# Altium PCB PCB1_1.pcbdoc (part 2 of 2)
Units mil, origin at the board's own origin, x right, y up, seen from the top; angles counter-clockwise.
Board outline 2868.46 x 4078.48 mil, 4 copper layers (Top Layer, Inner1, Inner2, Bottom Layer); 93 components, 179 nets, 649 pads, 461 vias.
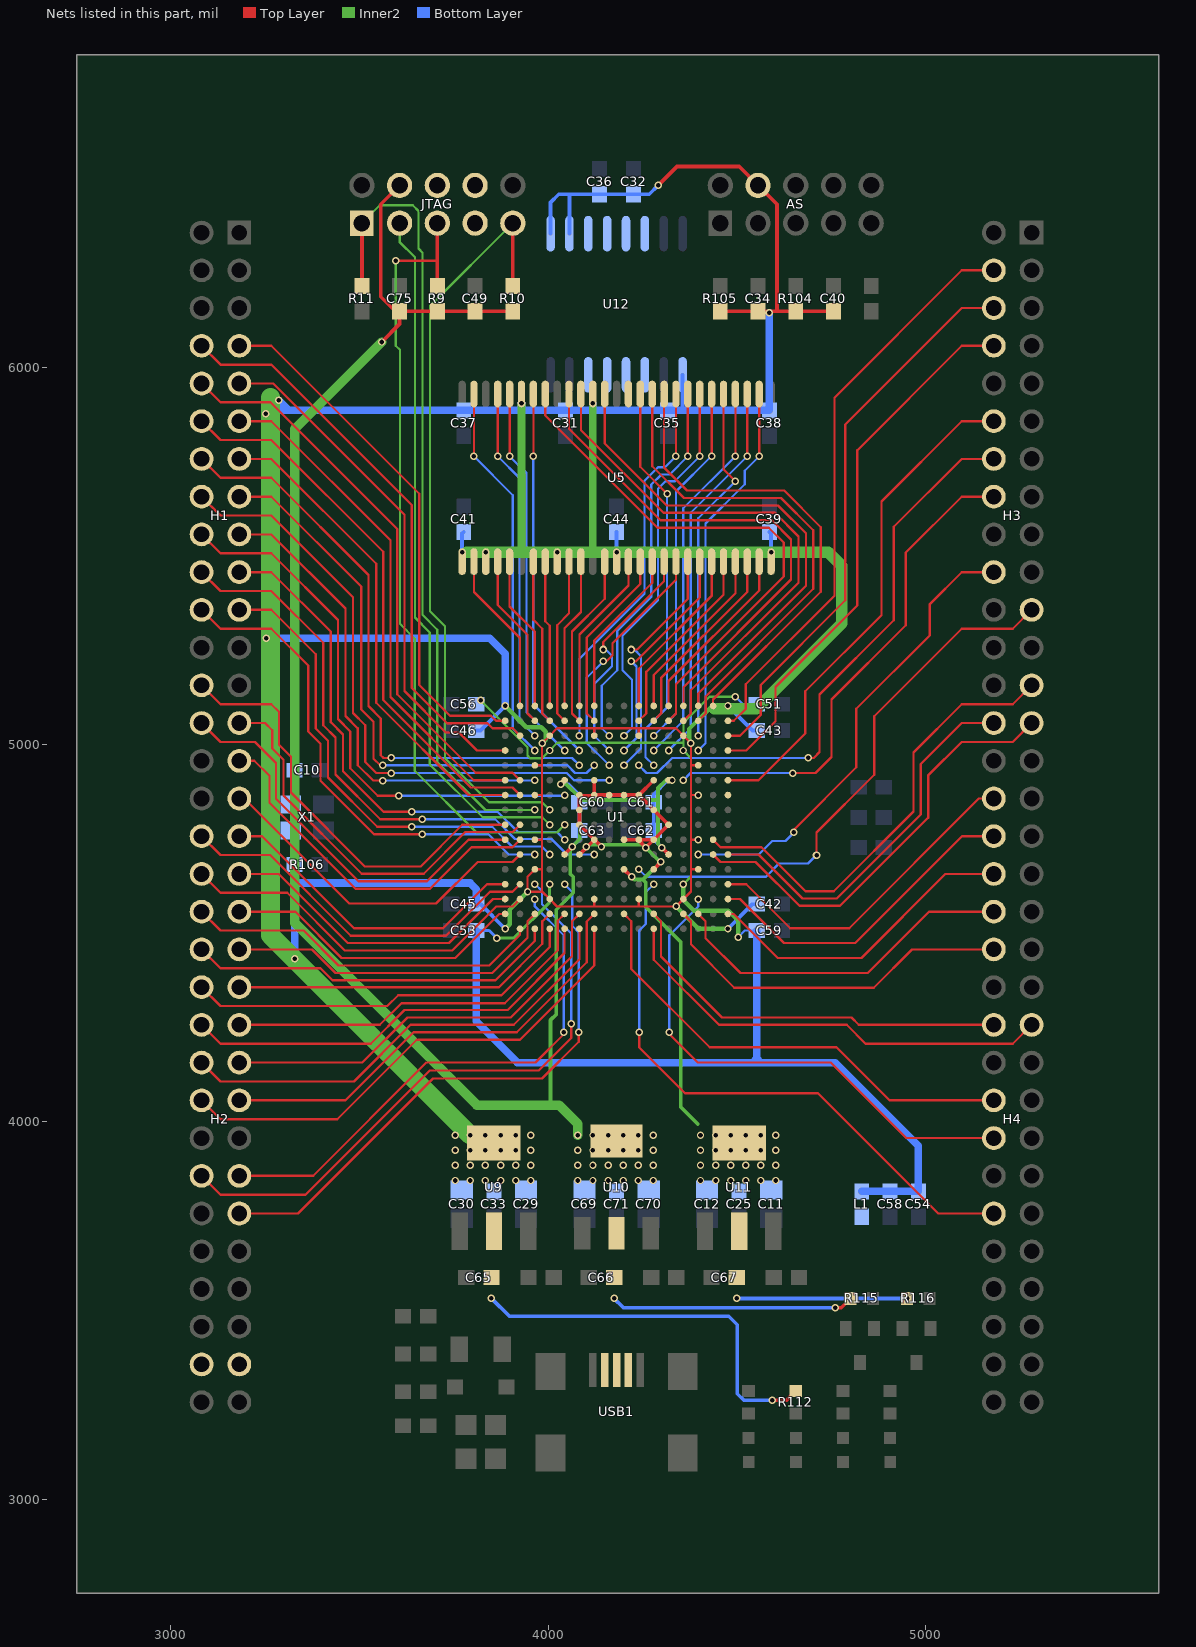
[diagram p4: the nets of this part, all layers, seen from the top]

## Via types
v1: diameter 19.7, hole 12, Top Layer to Bottom Layer, 304 vias
v2: diameter 20, hole 12, Top Layer to Bottom Layer, 157 vias

## Nets (pads, with @x,y where several pads share a name; then routed paths per layer and width w, separated by ;. In a path a pad name is that pad's centre, name@x,y a point inside that pad or via, vN(x,y) a via of type N, cw(c..) or ccw(c..) an arc to the next point about the centre after c; other vN are vias at no path point) (continued)
SD_SCLK_O: H1.19 U1.K5 | length 1353.8
  Top Layer w6: H1.19@3181.1,5456.83 3266.1,5456.83 3423.37,5299.57 3423.37,5059.27 3456.1,5026.54 3456.1,4929 3563.28,4821.83 v2(3638.6,4821.83)
  Bottom Layer w6: v2(3638.6,4821.83) 3865.69,4821.83 3919.79,4767.73 4023.3,4767.73 v2(4043.3,4747.73)
SD_SW_I: H4.16 U1.R9 | length 1259.1
  Top Layer w6: U1.R9@4200.8,4550.93 4220.1,4531.63 4220.1,4405.12 4427.8,4197.43 4763.93,4197.43 4904.53,4056.83 H4.16@5181.1,4056.83
SDRAM_AD_O_0: U1.B10 U5.23 | length 514.9
  Top Layer w6: U1.B10@4240.2,5062.73 4259.84,5082.37 4259.84,5192.44 4464.57,5397.17 U5.23@4464.57,5484.7
SDRAM_AD_O_1: U1.A11 U5.24 | length 472.3
  Top Layer w6: U1.A11@4279.5,5102.13 4279.5,5184.3 4496.06,5400.86 U5.24@4496.06,5484.7
SDRAM_AD_O_2: U1.B11 U5.25 | length 524.7
  Top Layer w6: U1.B11@4279.5,5062.73 4299.21,5082.44 4299.21,5176.13 4527.56,5404.48 U5.25@4527.56,5484.7
SDRAM_AD_O_3: U1.A12 U5.26 | length 482
  Top Layer w6: U1.A12@4318.9,5102.13 4318.9,5167.98 4559.05,5408.13 U5.26@4559.05,5484.7
SDRAM_AD_O_4: U1.D14 U5.29 | length 1011.7
  Top Layer w6: v2@4559.15,5763.88 U5.29@4559.15,5928.88
  Bottom Layer w6: v2(4397.6,4984.03) 4417.1,5003.53 4417.1,5585.83 4521.1,5689.83 4521.1,5725.83 v2(4559.1,5763.83)
SDRAM_AD_O_5: U1.D12 U5.30 | length 1031.4
  Top Layer w6: v2(4527.56,5763.96) U5.30@4527.56,5928.96
  Bottom Layer w6: v2(4318.9,4984.03) 4377.9,5043.03 4377.9,5614.3 v2(4527.56,5763.96)
SDRAM_AD_O_6: U1.D11 U5.31 | length 1034.6
  Top Layer w6: v2(4496.06,5763.96) U5.31@4496.06,5928.96
  Bottom Layer w6: v2(4279.5,4984.03) 4358.1,5062.63 4358.1,5626 v2(4496.06,5763.96)
SDRAM_AD_O_7: U1.C14 U5.32 | length 959.5
  Top Layer w6: U5.32@4464.57,5928.96 4464.57,5729.36 v2(4496.1,5697.83)
  Bottom Layer w6: v2(4397.6,5023.33) 4397.6,5599.33 v2(4496.1,5697.83)
SDRAM_AD_O_8: U1.C11 U5.33 | length 969.7
  Top Layer w6: v2(4433.07,5763.96) U5.33@4433.07,5928.96
  Bottom Layer w6: v2(4279.5,5023.33) 4338.5,5082.33 4338.5,5670.23 4432.23,5763.96 v2(4433.07,5763.96)
SDRAM_AD_O_9: U1.C9 U5.34 | length 1023.8
  Top Layer w6: v2(4401.57,5763.96) U5.34@4401.57,5928.96
  Bottom Layer w6: v2(4200.8,5023.33) 4222.1,5044.63 4222.1,5171.83 4197.1,5196.83 4197.1,5288.83 4291.1,5382.83 4291.1,5677.83 4311.1,5697.83 4335.44,5697.83 v2(4401.57,5763.96)
SDRAM_AD_O_10: U1.A10 U5.22 | length 462.5
  Top Layer w6: U1.A10@4240.2,5102.13 4240.2,5200.58 4433.07,5393.45 U5.22@4433.07,5484.7
SDRAM_AD_O_11: U1.C8 U5.35 | length 1021.2
  Top Layer w6: v2(4370.08,5763.96) U5.35@4370.08,5928.96
  Bottom Layer w6: v2(4161.4,5023.33) 4141.73,5043 4141.73,5155.44 4183.1,5196.81 4183.1,5300.83 4273.1,5390.83 4273.1,5688.83 4300.1,5715.83 4321.95,5715.83 v2(4370.08,5763.96)
SDRAM_AD_O_12: U1.C6 U5.36 | length 1022.4
  Top Layer w6: v2(4338.58,5763.96) U5.36@4338.58,5928.96
  Bottom Layer w6: v2(4082.7,5023.33) 4082.7,5227.43 4255.1,5399.83 4255.1,5698.83 4291.1,5734.83 4309.45,5734.83 v2(4338.58,5763.96)
SDRAM_BA_O_0: U1.E9 U5.20 | length 645.3
  Top Layer w6: v2(4220.47,5251.71) 4236.22,5251.71 4370.08,5385.57 U5.20@4370.08,5484.7
  Bottom Layer w6: v2(4200.8,4944.63) 4246.1,4989.93 4246.1,5233.96 4228.35,5251.71 v2(4220.47,5251.71)
SDRAM_BA_O_1: U1.D9 U5.21 | length 602
  Top Layer w6: v2(4220.47,5220.22) 4232.28,5220.22 4401.57,5389.5 U5.21@4401.57,5484.7
  Bottom Layer w6: v2(4200.8,4984.03) 4234.1,5017.33 4234.1,5206.59 v2(4220.47,5220.22)
SDRAM_CAS_O: U1.A7 U5.17 | length 446.2
  Top Layer w6: U1.A7@4122,5102.13 4122,5275.29 4275.59,5428.88 U5.17@4275.59,5484.7
SDRAM_CKE_O: U1.A15 U5.37 | length 1267.9
  Top Layer w6: U5.37@4307.08,5928.96 4307.08,5733.85 4367.97,5672.97 4625.41,5672.97 4722.44,5575.94 4722.44,5404.49 4437,5119.06 U1.A15@4437,5102.13
SDRAM_CLK_O: U1.B14 U5.38 | length 1320.4
  Top Layer w6: U5.38@4275.59,5928.96 4275.59,5737.51 4359.81,5653.29 4617.26,5653.29 4702.76,5567.79 4702.76,5412.64 4417.32,5127.21 4417.32,5082.45 U1.B14@4397.6,5062.73
SDRAM_CS_O: U1.E8 U5.19 | length 667.2
  Top Layer w6: v2(4145.67,5220.22) 4153.54,5220.22 4170.06,5236.73 4170.06,5268.23 4338.58,5436.75 U5.19@4338.58,5484.7
  Bottom Layer w6: v2(4145.67,5220.22) 4102.1,5176.65 4102.1,5003.93 v2(4161.4,4944.63)
SDRAM_DA_IO_0: U1.A2 U5.2 | length 433.1
  Top Layer w6: U5.2@3803.15,5484.7 3803.15,5404.42 3925.2,5282.37 U1.A2@3925.2,5102.13
SDRAM_DA_IO_1: U1.B3 U5.4 | length 462.8
  Top Layer w6: U5.4@3866.14,5484.7 3866.14,5369.57 3945.1,5290.61 3945.1,5082.23 U1.B3@3964.6,5062.73
SDRAM_DA_IO_2: U1.A3 U5.5 | length 410.3
  Top Layer w6: U5.5@3897.64,5484.7 3897.64,5365.65 3964.6,5298.69 U1.A3@3964.6,5102.13
SDRAM_DA_IO_3: U1.B4 U5.7 | length 439.9
  Top Layer w6: U5.7@3960.63,5484.7 3960.63,5330.45 3984.25,5306.83 3984.25,5082.38 U1.B4@4003.9,5062.73
SDRAM_DA_IO_4: U1.A4 U5.8 | length 387.4
  Top Layer w6: U5.8@3992.12,5484.7 3992.12,5326.75 4003.9,5314.97 U1.A4@4003.9,5102.13
SDRAM_DA_IO_5: U1.B5 U5.10 | length 443.2
  Top Layer w6: U1.B5@4043.3,5062.73 4023.62,5082.41 4023.62,5316.04 4055.12,5347.54 U5.10@4055.12,5484.7
SDRAM_DA_IO_6: U1.A5 U5.11 | length 400.5
  Top Layer w6: U1.A5@4043.3,5102.13 4043.3,5307.89 4086.61,5351.2 U5.11@4086.61,5484.7
SDRAM_DA_IO_7: U1.B6 U5.13 | length 466
  Top Layer w6: U1.B6@4082.7,5062.73 4062.99,5082.44 4062.99,5299.73 4149.6,5386.34 U5.13@4149.6,5484.7
SDRAM_DA_IO_8: U1.A14 U5.42 | length 1339
  Top Layer w6: U5.42@4149.6,5928.96 4149.6,5797.78 4313.82,5633.57 4609.09,5633.57 4683.04,5559.62 4683.04,5420.81 4397.6,5135.38 U1.A14@4397.6,5102.13
SDRAM_DA_IO_9: U1.B13 U5.44 | length 1404.5
  Top Layer w6: U5.44@4086.61,5928.96 4086.61,5832.98 4305.68,5613.92 4600.95,5613.92 4663.39,5551.48 4663.39,5428.95 4377.95,5143.52 4377.95,5082.38 U1.B13@4358.3,5062.73
SDRAM_DA_IO_10: U1.A13 U5.45 | length 1361.8
  Top Layer w6: U5.45@4055.12,5928.96 4055.12,5836.68 4297.54,5594.27 4592.81,5594.27 4643.74,5543.34 4643.74,5437.09 4358.3,5151.66 U1.A13@4358.3,5102.13
SDRAM_DA_IO_11: U1.B12 U5.47 | length 1427.3
  Top Layer w6: U5.47@3992.12,5928.96 3992.12,5871.79 4289.37,5574.55 4584.65,5574.55 4624.02,5535.18 4624.02,5445.26 4338.58,5159.83 4338.58,5082.41 U1.B12@4318.9,5062.73
SDRAM_DA_IO_12: U1.D6 U5.48 | length 995.5
  Top Layer w6: v2@3960.68,5764.01 U5.48@3960.68,5929.01
  Bottom Layer w6: v2(3960.63,5763.96) 3960.63,5106.1 v2(4082.7,4984.03)
SDRAM_DA_IO_13: U1.D5 U5.50 | length 1005.3
  Top Layer w6: v2@3897.69,5764.01 U5.50@3897.69,5929.01
  Bottom Layer w6: v2(3897.64,5763.96) 3942.1,5719.5 3942.1,5085.23 v2(4043.3,4984.03)
SDRAM_DA_IO_14: U1.C3 U5.51 | length 946.4
  Top Layer w6: v2@3866.19,5764.01 U5.51@3866.19,5929.01
  Bottom Layer w6: v2(3866.14,5763.96) 3924.1,5706 3924.1,5063.83 v2(3964.6,5023.33)
SDRAM_DA_IO_15: U1.D3 U5.53 | length 1011.8
  Top Layer w6: v2(3803.15,5763.96) U5.53@3803.15,5928.96
  Bottom Layer w6: v2@3803.1,5763.91 3906.1,5660.91 3906.1,5042.53 v2(3964.6,4984.03)
SDRAM_DQM_O_0: U1.A6 U5.15 | length 436.4
  Top Layer w6: U1.A6@4082.7,5102.13 4082.7,5291.57 4212.6,5421.47 U5.15@4212.6,5484.7
SDRAM_DQM_O_1: U1.E11 U5.39 | length 1046.2
  Top Layer w6: U5.39@4244.09,5928.96 4244.09,5735.84 v2(4315.1,5664.83)
  Bottom Layer w6: v2(4279.5,4944.63) 4258.1,4966.03 4258.1,5040.83 4315.1,5097.83 v2(4315.1,5664.83)
SDRAM_RAS_O: U1.D8 U5.18 | length 617.1
  Top Layer w6: v2(4145.67,5251.71) 4145.67,5271.4 4307.08,5432.81 U5.18@4307.08,5484.7
  Bottom Layer w6: v2(4145.67,5251.71) 4152.74,5251.71 4169.1,5235.35 4169.1,5207.37 4122.1,5160.37 4122.1,5023.33 v2(4161.4,4984.03)
SDRAM_WE_O: U1.B7 U5.16 | length 488.8
  Top Layer w6: U1.B7@4122,5062.73 4102.36,5082.37 4102.36,5283.42 4244.09,5425.15 U5.16@4244.09,5484.7
SLOT_A_O_0: H2.12 U1.T5 | length 1146.9
  Top Layer w6: H2.12@3081.1,4256.83 3131.1,4206.83 3529.34,4206.83 3618.74,4296.23 3892.52,4296.23 4043.3,4447.01 U1.T5@4043.3,4511.53
SLOT_A_O_1: H2.13 U1.R6 | length 1119
  Top Layer w6: H2.13@3181.1,4156.83 3507.34,4156.83 3626.94,4276.43 3900.72,4276.43 4063.1,4438.81 4063.1,4531.33 U1.R6@4082.7,4550.93
SLOT_A_O_2: H2.14 U1.T6 | length 1237.3
  Top Layer w6: H2.14@3081.1,4156.83 3131.1,4106.83 3485.06,4106.83 3635.06,4256.83 3908.84,4256.83 4082.7,4430.69 U1.T6@4082.7,4511.53
SLOT_A_O_3: H2.15 U1.R7 | length 1209
  Top Layer w6: H2.15@3181.1,4056.83 3462.5,4056.83 3643.1,4237.43 3916.88,4237.43 4102.1,4422.66 4102.1,4531.03 U1.R7@4122,4550.93
SLOT_A_O_4: H2.16 U1.T7 | length 1327.6
  Top Layer w6: H2.16@3081.1,4056.83 3131.1,4006.83 3441.1,4006.83 3651.8,4217.53 3925.12,4217.53 4122,4414.41 U1.T7@4122,4511.53
SLOT_A_O_5: H4.22 U1.N11 | length 1571
  Top Layer w6: v2(4241.1,4236.83) 4241.1,4196.83 4362.42,4075.51 4714.92,4075.51 5033.6,3756.83 H4.22@5181.1,3756.83
  Bottom Layer w6: v2(4241.1,4236.83) 4241.1,4506.83 4258.6,4524.33 4258.6,4608.73 v2(4279.5,4629.63)
SLOT_A_O_6: H2.21 U1.N5 | length 1521.9
  Top Layer w6: H2.21@3181.1,3756.83 3336.95,3756.83 3694.52,4114.4 3983.68,4114.4 4081.1,4211.83 v2(4081.1,4236.83)
  Bottom Layer w6: v2(4043.3,4629.63) 4063.6,4609.33 4063.6,4519.33 4081.1,4501.83 v2(4081.1,4236.83)
SLOT_A_O_7: H2.7 U1.R3 | length 899.8
  Top Layer w6: H2.7@3181.1,4456.83 3373.76,4456.83 3436.16,4394.43 3851.85,4394.43 3945.1,4487.69 3945.1,4531.43 U1.R3@3964.6,4550.93
SLOT_A_O_8: H2.8 U1.T3 | length 992.7
  Top Layer w6: H2.8@3081.1,4456.83 3131.1,4406.83 3396.18,4406.83 3428.08,4374.93 3859.92,4374.93 3964.6,4479.61 U1.T3@3964.6,4511.53
SLOT_A_O_9: H1.27 U1.J2 | length 1047
  Top Layer w6: H1.27@3181.1,5056.83 3249.39,5056.83 3268.6,5037.62 3268.6,4989.33 3298.6,4959.33 3298.6,4864.54 3505.61,4657.53 3670.06,4657.53 3780.36,4767.83 3905.9,4767.83 U1.J2@3925.2,4787.13
SLOT_A_O_10: H1.29 U1.K2 | length 980.4
  Top Layer w6: H1.29@3181.1,4956.83 3221.1,4956.83 3261.1,4916.83 3261.1,4845.47 3489.04,4617.53 3686.63,4617.53 3796.93,4727.83 3905.3,4727.83 U1.K2@3925.2,4747.73
SLOT_A_O_11: H1.20 U1.L7 | length 1536.1
  Top Layer w6: H1.20@3081.1,5456.83 3131.1,5406.83 3266.1,5406.83 3403.6,5269.33 3403.6,5050.75 3436.1,5018.25 3436.1,4920.72 3554.99,4801.83 v2(3666.1,4801.83)
  Bottom Layer w6: v2(3666.1,4801.83) 3859.66,4801.83 3912.16,4749.33 4008.6,4749.33 4049.5,4708.43 v2(4122,4708.43)
SLOT_A_O_12: H2.9 U1.R4 | length 938.1
  Top Layer w6: H2.9@3181.1,4356.83 3869.4,4356.83 3984.1,4471.53 3984.1,4531.13 U1.R4@4003.9,4550.93
SLOT_A_O_13: H2.10 U1.T4 | length 1056.5
  Top Layer w6: H2.10@3081.1,4356.83 3131.1,4306.83 3573.6,4306.83 3602.4,4335.63 3876.2,4335.63 4003.9,4463.33 U1.T4@4003.9,4511.53
SLOT_A_O_14: H2.11 U1.R5 | length 1029.8
  Top Layer w6: H2.11@3181.1,4256.83 3553.6,4256.83 3611.2,4314.43 3884.98,4314.43 4025.1,4454.55 4025.1,4532.73 U1.R5@4043.3,4550.93
SLOT_A_O_15: H1.18 U1.G5 | length 1460.8
  Top Layer w6: H1.18@3081.1,5556.83 3131.1,5506.83 3266.1,5506.83 3442.81,5330.12 3442.81,5067.33 3475.55,5034.59 3475.55,4937.06 3548.28,4864.33 v2(3603.6,4864.33)
  Bottom Layer w6: v2(3603.6,4864.33) 4041.7,4864.33 v2(4043.3,4865.93)
SLOT_BUSDIR_I: H1.14 U1.E6 | length 1598.7
  Top Layer w6: H1.14@3081.1,5756.83 3131.1,5706.83 3266.1,5706.83 3523.6,5449.33 3523.6,5101.86 3556.34,5069.13 3556.34,4971.59 3563.6,4964.33 v2(3583.6,4964.33)
  Bottom Layer w6: v2(3583.6,4964.33) 4063,4964.33 v2(4082.7,4944.63)
SLOT_CLOCK_O: H4.12 U1.R11 | length 1078.2
  Top Layer w6: U1.R11@4279.5,4550.93 4299.1,4531.33 4299.1,4437.85 4460.52,4276.43 4803.6,4276.43 4823.2,4256.83 H4.12@5181.1,4256.83
SLOT_CS1_O: H1.9 U1.D1 | length 1381.5
  Top Layer w6: H1.9@3181.1,5956.83 3271.1,5956.83 3618.98,5608.96 3618.98,5141.46 3728.6,5031.83 3763.6,5031.83 3811.4,4984.03 U1.D1@3885.8,4984.03
SLOT_CS2_O: H1.8 U1.C2 | length 1556.3
  Top Layer w6: H1.8@3081.1,6056.83 3131.1,6006.83 3266.1,6006.83 3638.42,5634.51 3638.42,5149.51 3731.66,5056.28 3839.16,5056.28 3852.6,5042.83 3905.7,5042.83 U1.C2@3925.2,5023.33
SLOT_D_IO_0: H2.2 U1.N2 | length 1009.8
  Top Layer w6: H2.2@3081.1,4756.83 3131.1,4706.83 3263.1,4706.83 3476.7,4493.23 3729.21,4493.23 3845.81,4609.83 3905.4,4609.83 U1.N2@3925.2,4629.63
SLOT_D_IO_1: H2.1 U1.N1 | length 849
  Top Layer w6: H2.1@3186.1,4756.83 3241.1,4756.83 3484.9,4513.03 3721,4513.03 3837.6,4629.63 U1.N1@3885.8,4629.63
SLOT_D_IO_2: H2.4 U1.P2 | length 984.4
  Top Layer w6: H2.4@3081.1,4656.83 3131.1,4606.83 3307.95,4606.83 3460.55,4454.23 3745.36,4454.23 3861.96,4570.83 3905.7,4570.83 U1.P2@3925.2,4590.33
SLOT_D_IO_3: H2.3 U1.P1 | length 828.8
  Top Layer w6: H2.3@3181.1,4656.83 3285.52,4656.83 3468.62,4473.73 3737.28,4473.73 3853.88,4590.33 U1.P1@3885.8,4590.33
SLOT_D_IO_4: H2.6 U1.T2 | length 952.5
  Top Layer w6: H2.6@3081.1,4556.83 3131.1,4506.83 3351.9,4506.83 3444.4,4414.33 3843.6,4414.33 3925.2,4495.93 U1.T2@3925.2,4511.53
SLOT_D_IO_5: H2.5 U1.R1 | length 803.7
  Top Layer w6: H2.5@3181.1,4556.83 3329.8,4556.83 3452.3,4434.33 3753.6,4434.33 3870.2,4550.93 U1.R1@3885.8,4550.93
SLOT_D_IO_6: H2.19 U1.P3 | length 1405.5
  Top Layer w6: H2.19@3181.1,3856.83 3376.95,3856.83 3676.95,4156.83 3966.1,4156.83 4041.1,4231.83 v2(4041.1,4236.83)
  Bottom Layer w6: v2(3964.6,4590.33) 3964.6,4570.83 4041.1,4494.33 v2(4041.1,4236.83)
SLOT_D_IO_7: H2.20 U1.N3 | length 1621.1
  Top Layer w6: H2.20@3081.1,3856.83 3131.1,3806.83 3356.95,3806.83 3685.73,4135.62 3974.89,4135.62 4061.1,4221.83 v2(4061.1,4259.33)
  Bottom Layer w6: v2(3964.6,4629.63) 3965.8,4629.63 3983.6,4611.83 3983.6,4576.83 4061.1,4499.33 v2(4061.1,4259.33)
SLOT_DATA_DIR_O: H3.21 U1.M10 | length 1468.1
  Top Layer w6: v2(4711.1,4706.83) 4711.1,4766.83 4864.24,4919.97 4864.24,5074.97 5096.1,5306.83 5231.1,5306.83 H3.21@5281.1,5356.83
  Bottom Layer w6: v2(4240.2,4669.03) 4259.9,4649.33 4576.94,4649.33 4611.94,4684.33 4688.6,4684.33 v2(4711.1,4706.83)
SLOT_DATA_OE_O: H1.31 U1.L2 | length 902.2
  Top Layer w6: H1.31@3192.13,4856.83 3194.59,4856.83 3472.89,4578.53 3702.78,4578.53 3813.08,4688.83 3905.6,4688.83 U1.L2@3925.2,4708.43
SLOT_INT_I: H1.11 U1.F1 | length 1342
  Top Layer w6: H1.11@3181.1,5856.83 3266.1,5856.83 3581.85,5541.08 3581.85,5126.08 3802.7,4905.23 U1.F1@3885.8,4905.23
SLOT_IOREQ_O: H1.21 U1.L4 | length 1263.8
  Top Layer w6: H1.21@3181.1,5356.83 3266.1,5356.83 3383.6,5239.33 3383.6,5042.47 3416.1,5009.97 3416.1,4912.44 3546.71,4781.83 v2(3638.6,4781.83)
  Bottom Layer w6: v2(3638.6,4781.83) 3851.38,4781.83 3903.88,4729.33 3983,4729.33 v2(4003.9,4708.43)
SLOT_M1_O: H1.15 U1.E7 | length 1500.9
  Top Layer w6: H1.15@3181.1,5656.83 3266.1,5656.83 3504.07,5418.87 3504.07,5092.7 3536.8,5059.96 3536.8,4962.43 3554.6,4944.63 v2(3561.1,4944.63)
  Bottom Layer w6: v2(3561.1,4944.63) 4050.8,4944.63 4071.1,4924.33 4101.7,4924.33 v2(4122,4944.63)
SLOT_MERQ_O: H1.16 U1.F8 | length 1628.5
  Top Layer w6: H1.16@3081.1,5656.83 3131.1,5606.83 3266.1,5606.83 3482.36,5390.57 3482.36,5083.71 3515.1,5050.97 3515.1,4953.44 3544.21,4924.33 v2(3583.6,4924.33)
  Bottom Layer w6: v2(3583.6,4924.33) 4049.28,4924.33 4068.38,4905.23 v2(4161.4,4905.23)
SLOT_RD_O: H1.22 U1.L3 | length 1311.8
  Top Layer w6: H1.22@3081.1,5356.83 3131.1,5306.83 3266.1,5306.83 3363.6,5209.33 3363.6,5034.18 3396.1,5001.68 3396.1,4904.15 3538.42,4761.83 v2(3666.1,4761.83)
  Bottom Layer w6: v2(3666.1,4761.83) 3841.82,4761.83 3895.22,4708.43 v2(3964.6,4708.43)
SLOT_RESET_IO: H1.28 U1.K1 | length 1079.6
  Top Layer w6: H1.28@3081.1,5056.83 3131.1,5006.83 3222.68,5006.83 3278.5,4951 3278.5,4856.21 3497.28,4637.43 3678.39,4637.43 3788.69,4747.73 U1.K1@3885.8,4747.73
SLOT_RFSH_I: H1.12 U1.G2 | length 1484.5
  Top Layer w6: H1.12@3081.1,5856.83 3131.1,5806.83 3266.1,5806.83 3562.41,5510.53 3562.41,5118.03 3794.6,4885.83 3905.3,4885.83 U1.G2@3925.2,4865.93
SLOT_SLOT1_O: H1.10 U1.F2 | length 1536
  Top Layer w6: H1.10@3081.1,5956.83 3131.1,5906.83 3263.6,5906.83 3599.53,5570.9 3599.53,5133.4 3808.1,4924.83 3905.6,4924.83 U1.F2@3925.2,4905.23
SLOT_SLOT2_O: H1.17 U1.F3 | length 1278.3
  Top Layer w6: H1.17@3181.1,5556.83 3266.1,5556.83 3462.36,5360.57 3462.36,5075.42 3495.1,5042.69 3495.1,4945.16 3535.92,4904.33 v2(3561.1,4904.33)
  Bottom Layer w6: v2(3561.1,4904.33) 3963.7,4904.33 v2(3964.6,4905.23)
SLOT_SLOT3_O: H1.7 U1.B1 | length 1413.4
  Top Layer w6: H1.7@3181.1,6056.83 3266.1,6056.83 3658.32,5664.61 3658.32,5157.75 3739.9,5076.18 3847.87,5076.18 3861.31,5062.73 U1.B1@3885.8,5062.73
SLOT_WAIT_I: H1.13 U1.G1 | length 1289.5
  Top Layer w6: H1.13@3181.1,5756.83 3266.1,5756.83 3544.15,5478.78 3544.15,5110.46 3788.69,4865.93 U1.G1@3885.8,4865.93
SLOT_WR_O: H1.26 U1.J1 | length 1156.1
  Top Layer w6: H1.26@3081.1,5156.83 3131.1,5106.83 3266.1,5106.83 3286.1,5086.83 3286.1,4999.12 3317.9,4967.32 3317.9,4872.53 3513.6,4676.83 3662.07,4676.83 3772.37,4787.13 U1.J1@3885.8,4787.13
TCK: JTAG.1 R11.1 U1.H3 | length 2134.6
  Top Layer w10: R11.1@3506.1,6215.29 JTAG.1@3506.1,6381.83
  Inner2 w6: JTAG.1@3506.1,6381.83 3553.6,6429.33 3641.1,6429.33 3656.1,6414.33 3656.1,6314.33 3666.8,6303.63 3666.8,5343.63 3706.1,5304.33 3706.1,4954.33 3833.9,4826.53 v2(3964.6,4826.53)
TDI: JTAG.9 R10.1 U1.H4 | length 2026.5
  Top Layer w10: R10.1@3906.1,6215.29 JTAG.9@3906.1,6381.83
  Inner2 w6: JTAG.9@3906.1,6381.83 3686.8,6162.53 3686.8,5352.85 3726.1,5313.55 3726.1,4963.55 3842.82,4846.83 3983.6,4846.83 v2(4003.9,4826.53)
TDO: JTAG.3 U1.J4 | length 1852
  Inner2 w6: JTAG.3@3606.1,6381.83 3606.1,6331.83 3646.8,6291.13 3646.8,5336.28 3686.1,5296.98 3686.1,4946.98 3826.25,4806.83 3984.2,4806.83 v2(4003.9,4787.13)
TMS: JTAG.5 R9.1 U1.J5 | length 2122
  Top Layer w6: v2(3596.1,6281.83) 3706.1,6281.83
  Top Layer w10: R9.1@3706.1,6215.29 3706.1,6281.83 JTAG.5@3706.1,6381.83
  Inner2 w6: v2(3596.1,6281.83) 3596.1,6056.83 3606.8,6046.13 3606.8,5319.71 3646.1,5280.41 3646.1,4930.41 3809.68,4766.83 4023,4766.83 v2(4043.3,4787.13)
V1.2: C11.2 C12.2 C25.2 C67.2 L1.1 R116.2 U1.F7 U1.F11 U1.G6 U1.G7 U1.G8 U1.G9 U1.G10 U1.H6 U1.H11 U1.J6 U1.J12 U1.K7 U1.K9 U1.K10 U1.K11 U1.L6 U1.M9 U1.M11 U11.2 U11.4 | length 2307.6
  Top Layer w10: U1.L6@4082.7,4708.43 U1.K7@4122,4747.73 ; U1.G6@4082.7,4865.93 U1.G6@4082.7,4863.93 ; U1.G7@4122,4863.93 U1.G6@4082.7,4863.93 ; U1.F7@4122,4905.23 U1.G7@4122,4865.93 U1.G8@4161.4,4865.93 U1.G9@4200.8,4865.93 U1.G10@4240.2,4865.93 ; v1(4141.1,4729.33) 4122.7,4747.73 U1.K7@4122,4747.73 ; U1.M9@4200.8,4669.03 4220.5,4649.33 v1(4221.1,4649.33) ; U1.K9@4200.8,4747.73 U1.K10@4240.2,4747.73 ; U1.M11@4279.5,4669.03 4298.6,4688.13 v1(4298.6,4689.33) ; U1.F11@4279.5,4905.23 U1.G10@4240.2,4865.93 ; U1.J12@4318.9,4787.13 U1.K11@4279.5,4747.73 ; U1.J12@4318.9,4787.23 4279.55,4826.58 U1.G10@4240.2,4865.93 ; U1.G6@4082.7,4863.93 U1.H6@4082.7,4826.53 4082.7,4787.03 U1.K7@4122,4747.73 ; U1.K10@4240.2,4747.73 U1.K11@4279.5,4747.73 ; U1.K10@4240.2,4747.73 4240.2,4745.23 v1(4258.6,4726.83) U1.K11@4279.5,4747.73
  Inner2 w10: v1(4101.1,4729.33) 4106.1,4734.33 4251.1,4734.33 v1(4258.6,4726.83) 4296.1,4689.33 v1(4298.6,4689.33) 4251.1,4641.83 ; v1(4221.1,4649.33) 4228.6,4641.83 4251.1,4641.83 ; 4396.1,3994.33 4351.1,4039.33 4351.1,4476.83 4258.5,4569.43 4258.5,4634.43 4251.1,4641.83
  Bottom Layer w10: v2(4499.57,3531.83) v2(4951.44,3531.83)
  other v1: 4403.6,3844.33 4443.6,3844.33 4483.6,3844.33 4523.6,3844.33 4563.6,3844.33 4603.6,3844.33 4403.6,3884.33 4443.6,3884.33 4483.6,3884.33 4523.6,3884.33 4563.6,3884.33 4603.6,3884.33 4403.6,3924.33 4443.6,3924.33 4483.6,3924.33 4523.6,3924.33 4563.6,3924.33 4603.6,3924.33 4403.6,3964.33 4443.6,3964.33 4483.6,3964.33 4523.6,3964.33 4563.6,3964.33 4603.6,3964.33
V1.2_PLL: C51.2 C53.2 C54.2 C56.2 C58.2 C59.2 L1.2 U1.D4 U1.D13 U1.N4 U1.N13 | length 4096.9
  Inner2 w6: v1(3821.1,5116.83) 3945.1,4992.83 3945.1,4970.83 3952.1,4963.83 3983.7,4963.83 v1(4003.9,4984.03) 4024.2,5004.33 4358.3,5004.33 ; v1(4358.3,4629.63) 4378.6,4649.93 4378.6,4963.73 v1(4358.3,4984.03) 4358.3,5004.33 ; v1(4496.1,5126.83) 4427.36,5126.83 4358.3,5057.77 4358.3,5004.33
  Inner2 w8: v1(3863.6,4486.83) 3908.6,4486.83 4003.9,4582.13 v1(4003.9,4629.63)
  Inner2 w12: v1(4358.3,4629.63) 4358.3,4587.63 4386.1,4559.83 4477.1,4559.83 4503.6,4533.33 v1(4503.6,4489.33)
  Bottom Layer w6: v1(4496.1,5126.83) 4516.1,5106.83 C51.2@4552.64,5106.83 ; v1(4503.6,4489.33) 4521.1,4506.83 C59.2@4552.64,4506.83
  Bottom Layer w8: C53.2@3809.57,4506.83 3843.6,4506.83 v1(3863.6,4486.83)
  Bottom Layer w20: C53.2@3809.57,4506.83 3809.57,4265.87 3918.6,4156.83 4541.46,4156.83 ; C59.2@4552.64,4506.83 4552.64,4168.01 ; L1.2@4831.1,3815.29 C58.2@4906.1,3815.29 C54.2@4981.1,3815.29 4981.1,3936.83 4761.1,4156.83 4563.82,4156.83 ; 4541.46,4156.83 4552.64,4168.01 ; 4541.46,4156.83 4563.82,4156.83 ; 4552.64,4168.01 4563.82,4156.83
V2.5: C49.2 C60.2 C61.2 C62.2 C63.2 C66.2 C69.2 C70.2 C71.2 C75.2 JTAG.4 R9.2 R10.2 R115.2 U1.F5 U1.F12 U1.L5 U1.L12 U10.2 U10.4 | length 5910.6
  Top Layer w10: v1(3558.6,6066.83) 3606.1,6114.33 C75.2@3606.1,6148.37 ; JTAG.4@3606.1,6481.83 3556.1,6431.83 3556.1,6186.83 3594.57,6148.37 R9.2@3706.1,6148.37 C49.2@3806.1,6148.37 R10.2@3906.1,6148.37 ; v1(4033.6,4894.33) 4043.3,4904.03 U1.F5@4043.3,4905.23 ; U1.L5@4043.3,4708.43 4043.3,4709.03 v1(4063.6,4729.33) ; v1(4301.1,4726.83) 4318.9,4709.03 U1.L12@4318.9,4708.43 ; U1.F12@4318.9,4905.23 v1(4328.12,4905.23) ; v2(4761.1,3506.83) 4776.44,3506.83 R115.2@4801.44,3531.83
  Inner2 w10: 4011.61,4044.33 4006.1,4049.84 4006.1,4269.33 4021.1,4284.33 4021.1,4561.83 ; 4021.1,4550.77 4021.1,4561.83 ; v1(4033.6,4894.33) 4048.45,4894.33 4083.6,4859.18 4083.6,4852.7 ; v1(4301.1,4726.83) 4291.1,4736.83 4291.1,4853.55 ; v1(4328.12,4905.23) 4312,4905.23 4291.1,4884.33 4291.1,4853.55 ; 4021.1,4561.83 4066.1,4606.83 4066.1,4649.32 4058.6,4656.82 4058.6,4724.33 v1(4063.6,4729.33) 4083.6,4749.33 4083.6,4852.7 ; 4083.6,4852.7 4290.26,4852.7 4291.1,4853.55
  Inner2 w25: v1(3558.6,6066.83) 3328.6,5836.83 3328.6,4526.83 3811.1,4044.33 4011.61,4044.33 4028.6,4044.33 4078.6,3994.33 v1(4078.6,3964.33)
  Bottom Layer w10: v1(4033.6,4894.33) 4053.6,4894.33 4082.64,4865.29 C60.2@4082.64,4846.83 C63.2@4082.64,4771.83 4082.64,4748.37 v1(4063.6,4729.33) ; v2(4174.57,3531.83) 4199.57,3506.83 v2(4761.1,3506.83) ; v1(4301.1,4726.83) 4279.57,4748.37 C62.2@4279.57,4771.83 C61.2@4279.57,4846.83 4279.57,4867.79 4317,4905.23 v1(4328.12,4905.23)
  other v1: 4078.6,3844.33 4118.6,3844.33 4158.6,3844.33 4198.6,3844.33 4238.6,3844.33 4278.6,3844.33 4078.6,3884.33 4118.6,3884.33 4158.6,3884.33 4198.6,3884.33 4238.6,3884.33 4278.6,3884.33 4078.6,3924.33 4118.6,3924.33 4158.6,3924.33 4198.6,3924.33 4238.6,3924.33 4278.6,3924.33 4118.6,3964.33 4158.6,3964.33 4198.6,3964.33 4238.6,3964.33 4278.6,3964.33
V3.3: AS.4 C10.1 C29.2 C30.2 C31.2 C32.2 C33.2 C34.2 C35.2 C36.2 C37.2 C38.2 C39.2 C40.2 C41.2 C42.2 C43.2 C44.2 C45.2 C46.2 C65.2 R104.2 R105.2 R106.2 R112.2 U1.A1 U1.A16 U1.C4 U1.C7 U1.C10 U1.C13 U1.E3 U1.E14 U1.G3 U1.G14 U1.K3 U1.K14 U1.M3 U1.M14 U1.P4 U1.P7 U1.P10 U1.P13 U1.T1 U1.T16 U5.1 U5.3 U5.9 U5.14 U5.27 U5.43 U5.49 U9.2 U9.4 U12.1 U12.2 U12.9 X1.1 X1.4 | length 13919.1
  Top Layer w6: U1.K3@3964.6,4747.73 3983.14,4747.73 3983.6,4747.27 ; U1.G3@3964.6,4865.93 3982.43,4865.93 3983.6,4864.75 ; U1.E3@3964.6,4944.63 3983.54,4944.63 ; U1.P7@4122,4590.33 4122,4571.48 4121.35,4570.83 ; U1.C7@4122,5023.33 4122,5042.24 4122.59,5042.83 ; U1.P10@4240.2,4590.33 4240.2,4571.14 4240.51,4570.83 ; U1.C10@4240.2,5023.33 4240.2,5042.7 4240.08,5042.83 ; U1.M14@4397.6,4669.03 4379.82,4669.03 4378.1,4667.32 ; v1(4397.6,4747.73) 4378.39,4747.73 4378.1,4747.44 ; v1(4397.6,4865.93) 4379.08,4865.93 4378.1,4864.96 ; U1.E14@4397.6,4944.63 4378.66,4944.63 4378.1,4944.07 ; 3983.6,4610.63 U1.P4@4003.9,4590.33 4023.4,4570.83 4121.35,4570.83 ; 3983.6,4610.63 3983.6,4668.27 ; 3983.6,4610.63 3982.8,4609.83 v1(3945.1,4609.83) 3945.1,4649.53 U1.M3@3964.6,4669.03 3982.84,4669.03 3983.6,4668.27 ; 3983.6,4668.27 3983.6,4747.27 ; 3983.6,4747.27 3983.6,4864.75 ; 3983.6,4864.75 v1(3983.6,5003.03) U1.C4@4003.9,5023.33 4023.4,5042.83 4122.59,5042.83 ; 4121.35,4570.83 4240.51,4570.83 ; 4122.59,5042.83 4240.08,5042.83 ; 4240.08,5042.83 4338.8,5042.83 U1.C13@4358.3,5023.33 v1(4378.1,5003.53) 4378.1,4944.07 ; 4240.51,4570.83 v1(4338.8,4570.83) U1.P13@4358.3,4590.33 4378.1,4610.13 4378.1,4667.32 ; 4378.1,4667.32 4378.1,4747.44 ; 4378.1,4747.44 4378.1,4864.96 ; 4378.1,4864.96 4378.1,4944.07
  Top Layer w10: v1(4291.1,6481.83) 4341.1,6531.83 4506.1,6531.83 AS.4@4556.1,6481.83 4606.1,6431.83 4606.1,6149.44 4605.03,6148.37 ; R105.2@4456.1,6148.37 C34.2@4556.1,6148.37 4605.03,6148.37 ; v2(4593.6,3261.83) 4631.44,3261.83 R112.2@4656.1,3286.49 ; C40.2@4756.1,6148.37 R104.2@4656.1,6148.37 4605.03,6148.37
  Inner2 w12: v1(3885.8,4511.53) 3897.8,4523.53 3897.8,4562.53 v1(3945.1,4609.83) ; v2(3885.8,5102.13) 3942.1,5045.83 3981.1,5045.83 3993.1,5033.83 3993.1,5012.53 v1(3983.6,5003.03) ; v1(4338.8,4570.83) 4398.1,4511.53 v1(4476.4,4511.53) ; v1(4378.1,5003.53) 4373.3,5008.33 4373.3,5041.03 4434.4,5102.13 v1(4476.4,5102.13)
  Inner2 w20: 3924.75,5509.7 3929.13,5514.09 v2(3929.13,5903.96) ; v2(4118.11,5903.96) 4118.11,5511.12 4119.53,5509.7
  Inner2 w30: 3783.6,5509.7 v2(3834.64,5509.7) 3924.75,5509.7 v2(4023.62,5509.7) 4119.53,5509.7 v2(4181.1,5509.7) v2(4590.55,5509.7) 4742.23,5509.7 4778.1,5473.83 4778.1,5320.83 4552.1,5094.83 4440.1,5094.83
  Inner2 w50: 3263.6,5919.33 3263.6,4494.33 v1(3793.6,3964.33)
  Bottom Layer w10: v2(3771.65,5509.7) 3771.65,5558.92 C41.2@3776.1,5563.37 ; C45.2@3809.57,4576.83 3820.5,4576.83 v1(3885.8,4511.53) ; C46.2@3809.57,5036.83 3820.5,5036.83 v2(3885.8,5102.13) ; v2(3849.57,3531.83) 3897.07,3484.33 4478.6,3484.33 4501.1,3461.83 4501.1,3279.33 4518.6,3261.83 v2(4593.6,3261.83) ; 3927.32,5885.29 3929.13,5887.11 ; U12.1@4006.1,6353.85 4006.1,6436.83 4027.64,6458.37 4054.05,6458.37 ; U12.2@4056.1,6353.85 4056.1,6456.31 4054.05,6458.37 ; 4116.71,5885.29 4118.11,5886.7 ; v2(4181.1,5509.7) C44.2@4181.1,5563.37 ; v1(4291.1,6481.83) 4267.64,6458.37 C32.2@4226.1,6458.37 C36.2@4136.1,6458.37 4054.05,6458.37 ; C35.2@4316.1,5885.29 4356.1,5885.29 U12.9@4356.1,5979.81 ; v1(4476.4,4511.53) 4541.7,4576.83 C42.2@4552.64,4576.83 ; v1(4476.4,5102.13) 4541.7,5036.83 C43.2@4552.64,5036.83 ; C39.2@4586.1,5563.37 4590.55,5558.92 v2(4590.55,5509.7)
  Bottom Layer w20: v1(3251.1,5876.83) 3259.57,5885.29 ; v1(3252.1,5281.83) 3844.95,5281.83 3885.8,5240.98 v2(3885.8,5102.13) ; C10.1@3327.64,4931.83 3328.6,4930.87 3328.6,4632.83 ; v1(3328.6,4431.83) 3328.6,4632.83 ; C45.2@3809.57,4576.83 3809.57,4616.37 3793.1,4632.83 3328.6,4632.83 ; 3929.13,5887.11 v2(3929.13,5903.96) ; 4118.11,5886.7 v2(4118.11,5903.96) ; v1(4586.1,6144.33) C38.2@4586.1,5885.29 C35.2@4316.1,5885.29 4116.71,5885.29 C31.2@4046.1,5885.29 3927.32,5885.29 C37.2@3776.1,5885.29 3312.64,5885.29 ; 3259.57,5885.29 v1@3285.21,5910.93 ; 3259.57,5885.29 3285.21,5885.29 ; 3285.21,5885.29 v1@3285.21,5910.93 ; 3285.21,5885.29 3312.64,5885.29 ; v1@3285.21,5910.93 v1(3286.1,5911.83) 3312.64,5885.29
  other v1: 3753.6,3844.33 3793.6,3844.33 3833.6,3844.33 3873.6,3844.33 3913.6,3844.33 3953.6,3844.33 3753.6,3884.33 3793.6,3884.33 3833.6,3884.33 3873.6,3884.33 3913.6,3884.33 3953.6,3884.33 3753.6,3924.33 3793.6,3924.33 3833.6,3924.33 3873.6,3924.33 3913.6,3924.33 3953.6,3924.33 3753.6,3964.33 3833.6,3964.33 3873.6,3964.33 3913.6,3964.33 3953.6,3964.33
VGA_B_O_0: H3.8 U1.D16 | length 1442.7
  Top Layer w6: U1.D16@4476.4,4984.03 4524.6,4984.03 4602.3,5061.73 4602.3,5152.04 4819.4,5369.15 4819.4,5780.13 5096.1,6056.83 H3.8@5181.1,6056.83
VGA_B_O_1: H3.12 U1.F16 | length 1340.6
  Top Layer w6: U1.F16@4476.4,4905.23 4557.24,4905.23 4681.1,5029.09 4681.1,5140.84 4883.04,5342.79 4883.04,5643.77 5096.1,5856.83 H3.12@5181.1,5856.83
VGA_B_O_2: H4.11 U1.T11 | length 1196.4
  Top Layer w6: U1.T11@4279.5,4511.53 4279.5,4429.73 4452.4,4256.83 4791.1,4256.83 4841.1,4206.83 5231.1,4206.83 H4.11@5281.1,4256.83
VGA_B_O_3: H3.16 U1.F13 | length 1336.2
  Top Layer w6: v2(4648.6,4924.33) 4708.6,4924.33 4751.1,4966.83 4751.1,5119.33 4947.92,5316.15 4947.92,5508.65 5096.1,5656.83 H3.16@5181.1,5656.83
  Bottom Layer w6: v2(4358.3,4905.23) 4377.4,4924.33 v2(4648.6,4924.33)
VGA_B_O_4: H3.25 U1.K15 | length 1218.2
  Top Layer w6: U1.K15@4437,4747.73 4456.9,4727.83 4565.28,4727.83 4681.88,4611.23 4756.87,4611.23 4967.9,4822.27 4967.9,4978.63 5096.1,5106.83 5231.1,5106.83 H3.25@5281.1,5156.83
VGA_G_O_0: H3.14 U1.E10 | length 1528.5
  Top Layer w6: v2(4688.6,4964.33) 4703.6,4964.33 4719.28,4980.01 4719.28,5132.51 4916.1,5329.33 4916.1,5576.83 5096.1,5756.83 H3.14@5181.1,5756.83
  Bottom Layer w6: v2(4240.2,4944.63) 4260.5,4924.33 4288.6,4924.33 4328.6,4964.33 v2(4688.6,4964.33)
VGA_G_O_1: H3.20 U1.L14 | length 1237
  Top Layer w6: v2(4651.1,4766.83) 4651.1,4774.33 4816.51,4939.74 4816.51,5094.74 5011.56,5289.79 5011.56,5372.29 5096.1,5456.83 H3.20@5181.1,5456.83
  Bottom Layer w6: v2(4397.6,4708.43) 4558.17,4708.43 4594.07,4744.33 4628.6,4744.33 v2(4651.1,4766.83)
VGA_G_O_2: H3.28 U1.L16 | length 1024
  Top Layer w6: U1.L16@4476.4,4708.43 4557.24,4708.43 4673.84,4591.83 4764.9,4591.83 4987.3,4814.23 4987.3,4948.03 5096.1,5056.83 H3.28@5181.1,5056.83
VGA_G_O_3: H3.27 U1.L15 | length 1166.6
  Top Layer w6: U1.L15@4437,4708.43 4456.6,4688.83 4549.12,4688.83 4665.72,4572.23 4773.02,4572.23 5006.9,4806.11 5006.9,4917.63 5096.1,5006.83 5231.1,5006.83 H3.27@5281.1,5056.83
VGA_G_O_4: H3.32 U1.N16 | length 895.4
  Top Layer w6: U1.N16@4476.4,4629.63 4524.6,4629.63 4641.2,4513.03 4797.54,4513.03 5141.34,4856.83 H3.32@5181.1,4856.83
VGA_HSYNC_N_O: H3.4 U1.B16 | length 1544.9
  Top Layer w6: U1.B16@4476.4,5062.73 4492,5062.73 4523.6,5094.33 4523.6,5159.33 4758.6,5394.33 4758.6,5919.33 5096.1,6256.83 H3.4@5181.1,6256.83
VGA_R_O_0: H4.2 U1.P16 | length 870.3
  Top Layer w6: U1.P16@4476.4,4590.33 4508.32,4590.33 4624.92,4473.73 4813.82,4473.73 5096.92,4756.83 H4.2@5181.1,4756.83
VGA_R_O_1: H4.18 U1.P14 | length 1359.1
  Top Layer w6: v2(4321.1,4236.83) 4321.1,4231.83 4396.1,4156.83 4748.6,4156.83 4948.6,3956.83 H4.18@5176.1,3956.83
  Bottom Layer w6: v2(4321.1,4236.83) 4321.1,4494.33 4397.6,4570.83 v2(4397.6,4590.33)
VGA_R_O_2: H4.4 U1.R16 | length 845.2
  Top Layer w6: U1.R16@4476.4,4550.93 4492,4550.93 4608.6,4434.33 4830.14,4434.33 5052.64,4656.83 H4.4@5181.1,4656.83
VGA_R_O_3: H4.6 U1.R14 | length 941.8
  Top Layer w6: U1.R14@4397.6,4550.93 4417.1,4531.43 4417.1,4486.72 4509.4,4394.43 4846.85,4394.43 5009.25,4556.83 H4.6@5181.1,4556.83
VGA_R_O_4: H4.8 U1.R13 | length 981.3
  Top Layer w6: U1.R13@4358.3,4550.93 4378.1,4531.13 4378.1,4470.57 4493.24,4355.43 4863,4355.43 4964.4,4456.83 H4.8@5181.1,4456.83
VGA_VSYNC_N_O: H3.6 U1.C16 | length 1493.9
  Top Layer w6: U1.C16@4476.4,5023.33 4508.32,5023.33 4563,5078.01 4563,5157.74 4787.58,5382.33 4787.58,5848.31 5096.1,6156.83 H3.6@5181.1,6156.83
"": H2.29 H2.30 JTAG.6 JTAG.7 JTAG.8 U1.G16 U1.M2 U5.40 U12.3 U12.4 U12.5 U12.6 U12.11 U12.12 U12.13 U12.14 USB1.2 USB1.3 USB1.4

## Polygon pours and split planes (outlines as drawn)
DGND on Top Layer (solid, remove dead copper, pour order 0): 3000,3035.18 5362.2,3035.18 5362.2,6578.48 3000,6578.48
DGND on Bottom Layer (solid, remove dead copper, pour order 1): 3000,3035.18 5362.2,3035.18 5362.2,6578.48 3000,6578.48
DGND on Inner1 (solid, remove dead copper, pour order 2): 3000,3035.18 5362.2,3035.18 5362.2,6578.48 3000,6578.48
DGND on Inner2 (solid, remove dead copper, pour order 3): 3000,3035.18 5362.2,3035.18 5362.2,6578.48 3000,6578.48

## Keep-outs
Board Outline Layer:
  lines w5 net "": 3000,3035.18 5362.2,3035.18 5362.2,6578.48 3000,6578.48 3000,3035.18

## Other copper
Top Layer:
  region net V3.3: 3741.1,3996.83 3971.1,3996.83 3971.1,3791.83 3886.1,3791.83 3886.1,3521.83 3826.1,3521.83 3826.1,3791.83 3741.1,3791.83
  region net V2.5: 4066.1,3996.9 4296.1,3996.9 4296.1,3791.9 4211.1,3791.9 4211.1,3521.9 4151.1,3521.9 4151.1,3791.9 4066.1,3791.9
  region net V1.2: 4391.1,3996.83 4621.1,3996.83 4621.1,3791.83 4536.1,3791.83 4536.1,3521.83 4476.1,3521.83 4476.1,3791.83 4391.1,3791.83
  region net $1N37139: 3851.1,3359.33 3906.1,3359.33 3948.6,3401.83 4068.6,3401.83 4078.6,3391.83 4078.6,3294.33 4131.1,3294.33 4131.1,3411.83 4101.1,3441.83 3851.1,3441.83
  region net 5V: 3036.1,3061.83 3036.1,3306.83 3226.1,3306.83 3401.1,3131.83 3658.6,3131.83 3658.6,3476.83 3683.6,3501.83 3911.1,3501.83 3921.1,3511.83 3921.1,3761.83 3971.1,3761.83 3971.1,3511.83 3981.1,3501.83 4236.1,3501.83 4246.1,3511.83 4246.1,3761.83 4296.1,3761.83 4296.1,3511.83 4306.1,3501.83 4561.1,3501.83 4571.1,3511.83 4571.1,3761.83 4621.1,3761.83 4621.1,3501.83 4576.1,3456.83 3713.6,3456.83 3705.48,3448.71 3705.48,3114.95 3711.1,3109.33 3746.1,3109.33 3751.1,3114.33 3751.1,3221.83 3728.6,3244.33 3728.6,3441.83 3791.1,3441.83 3791.1,3359.33 3776.1,3344.33 3776.1,3271.83 3811.1,3236.83 3811.1,3061.83 3661.1,3061.83 3658.6,3061.83
Inner1:
  region net V3.3: 3741.1,3791.83 3971.1,3791.83 3971.1,3996.83 3741.1,3996.83
  region net V2.5: 4066.1,3791.83 4296.1,3791.83 4296.1,3996.83 4066.1,3996.83
  region net V1.2: 4391.1,3791.83 4621.1,3791.83 4621.1,3996.83 4391.1,3996.83
Inner2:
  region net V3.3: 3741.1,3791.83 3971.1,3791.83 3971.1,3996.83 3741.1,3996.83
  region net V2.5: 4066.1,3791.83 4296.1,3791.83 4296.1,3996.83 4066.1,3996.83
  region net V1.2: 4391.1,3791.83 4621.1,3791.83 4621.1,3996.83 4391.1,3996.83
Bottom Layer:
  region net V2.5: 4066.1,3791.83 4296.1,3791.83 4296.1,3996.83 4066.1,3996.83
  region net V1.2: 4391.1,3791.83 4621.1,3791.83 4621.1,3996.83 4391.1,3996.83
  region net V3.3: 3741.1,3791.83 3971.1,3791.83 3971.1,3996.83 3741.1,3996.83
  region net V1.2: 4603.6,3844.33 4693.6,3844.33 4766.1,3771.83 4853.6,3771.83 4853.6,3724.33 4741.1,3724.33 4673.6,3791.83 4603.6,3791.83

## Silkscreen, mask and mechanical layers (free items; w line width, h text height)
Top Silkscreen Layer:
  text "JLCJLCJLCJLC" at 4333.82,5540.57 h25.55
  text "Core Board v0.13" at 3775.8,5348.05 h76.65
  text "Design date:2023.9.30" at 3941.35,5274.31 h51.1